# Altium PCB ESP32_RGBW_Controller-v2.PcbDoc
Units mm, origin at the board's own origin, x right, y up, seen from the top; angles counter-clockwise.
Board outline 34.92 x 50.42 mm, 2 copper layers (Top Layer, Bottom Layer); 11 components, 14 nets, 34 pads, 66 vias.
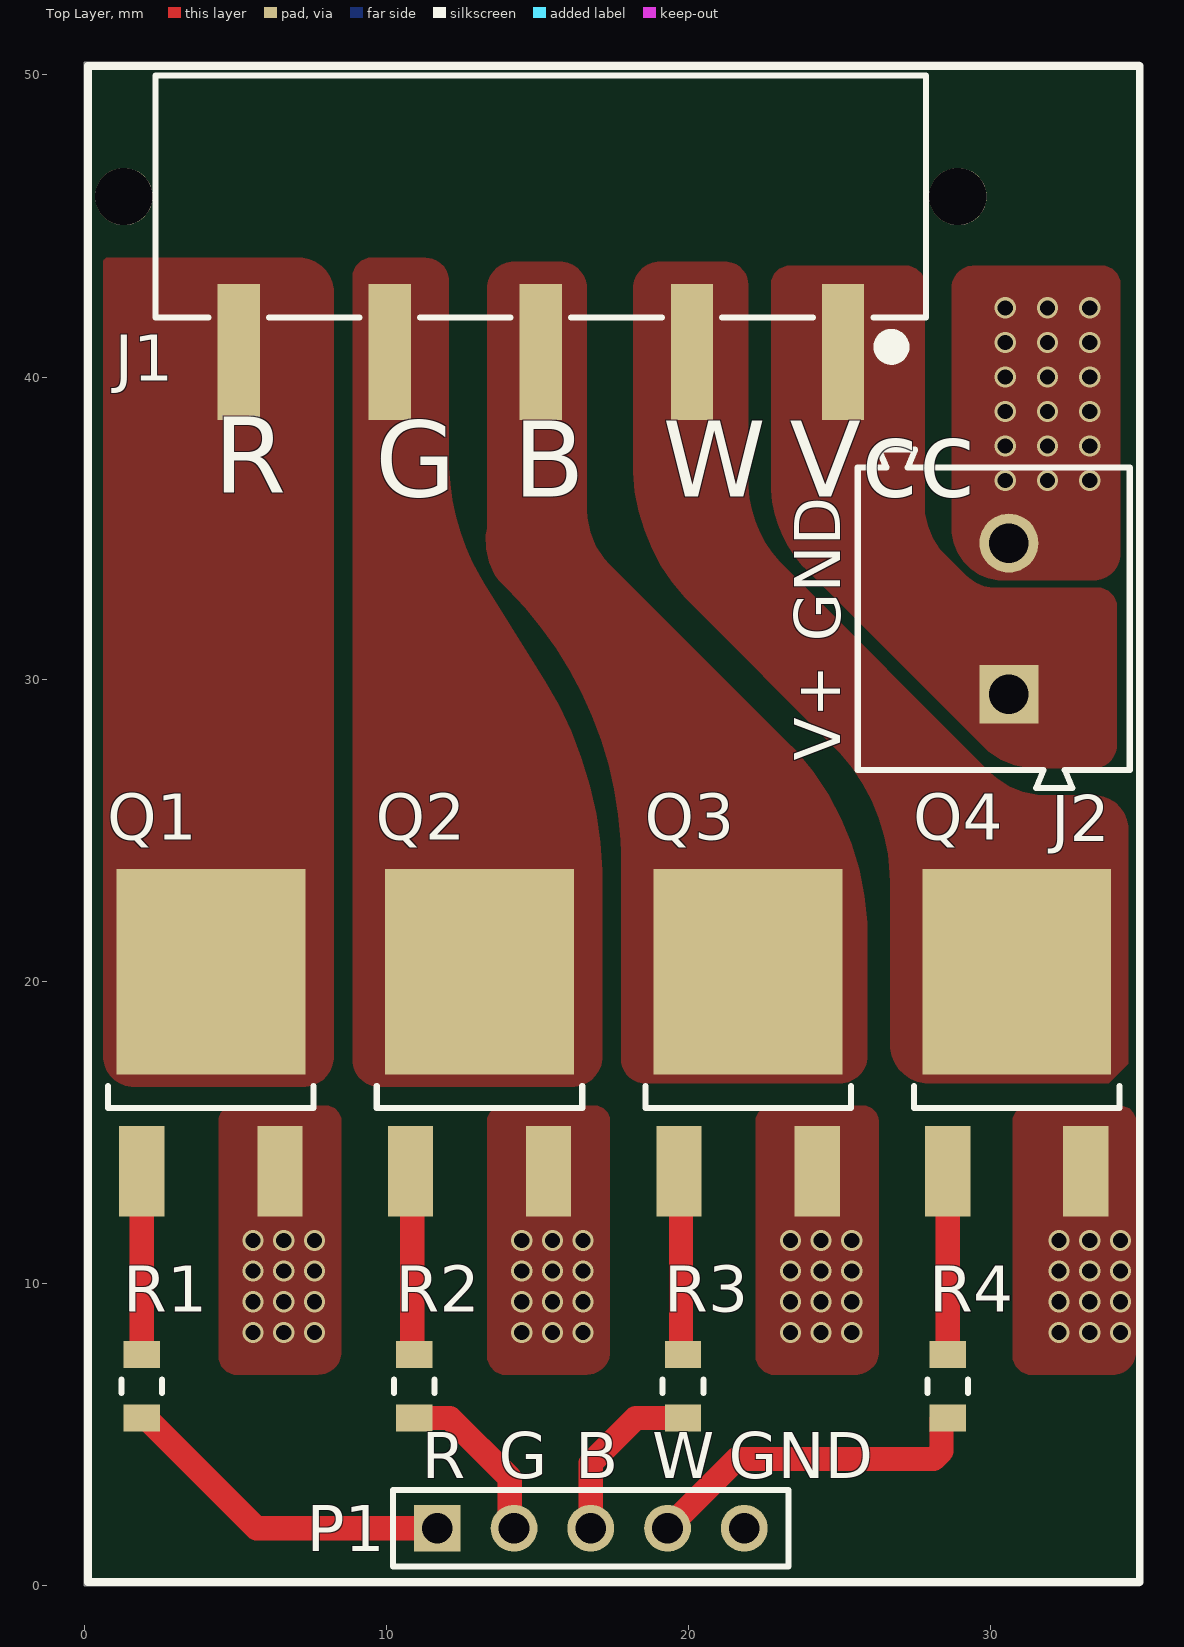
[diagram p0: Top Layer view]
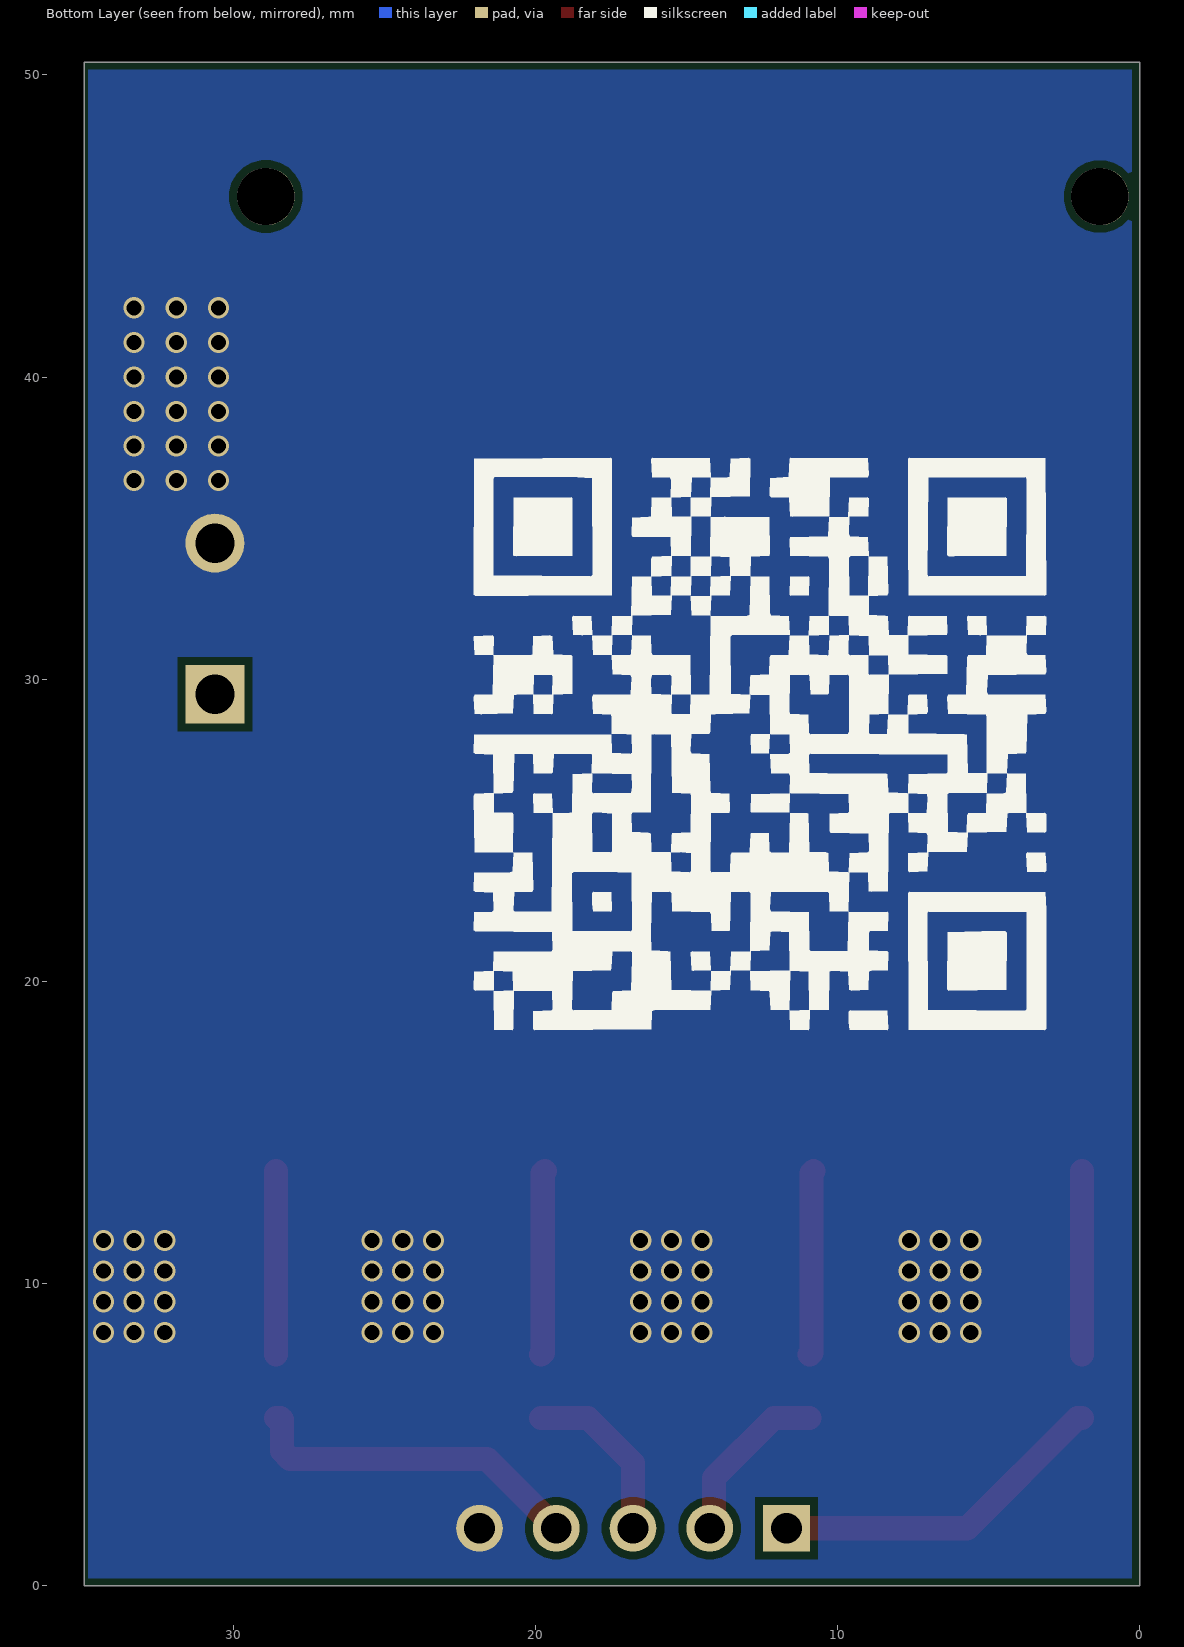
[diagram p1: Bottom Layer view, seen from below]
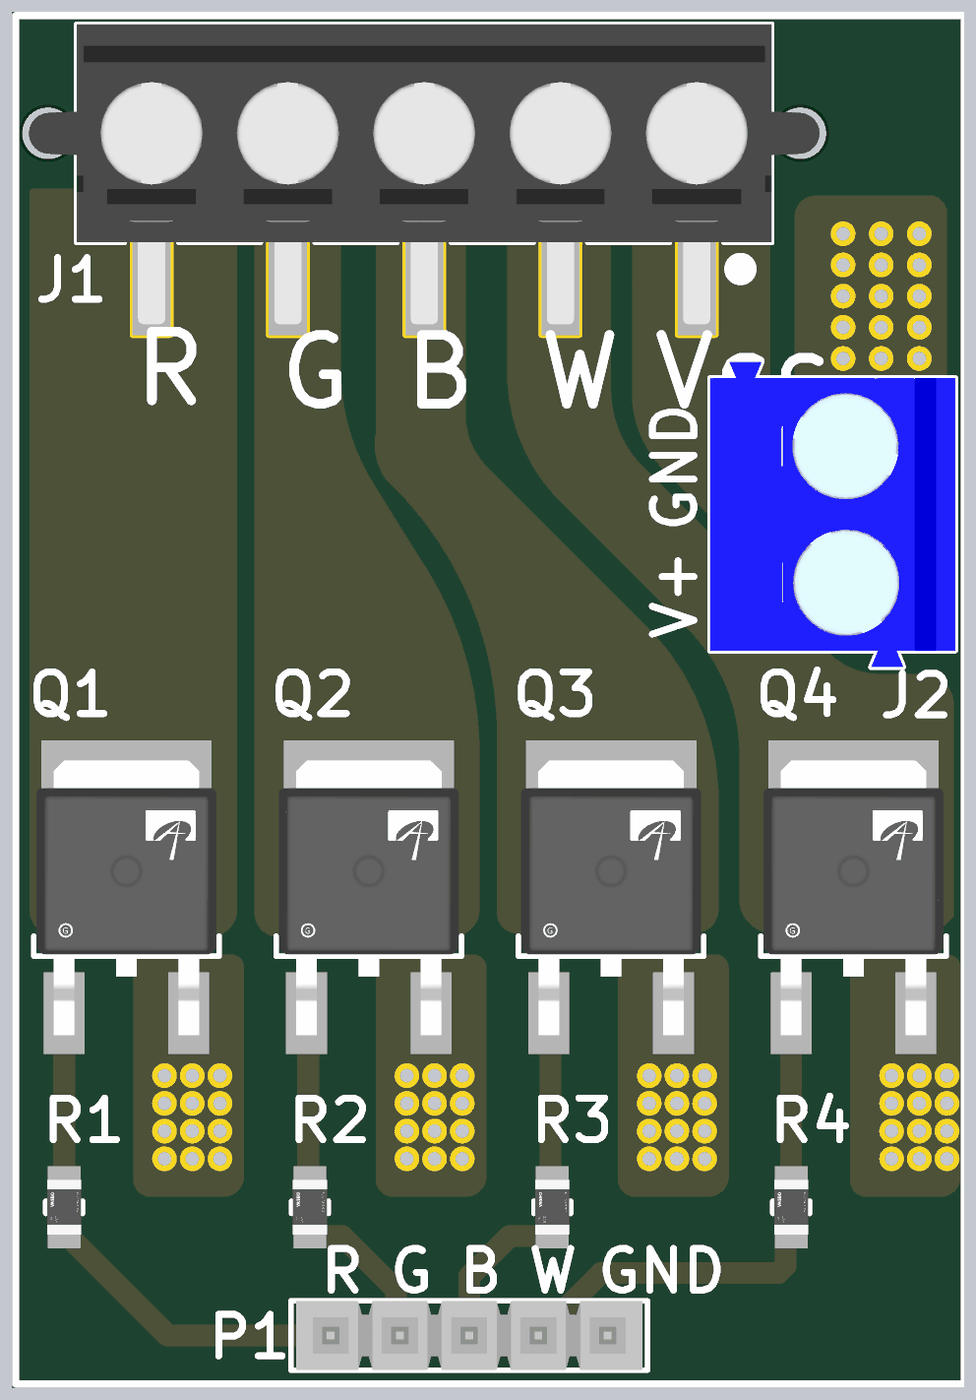
[diagram p2: 3D render of the assembled board from above, using the file's embedded part models]

## Layer stack, top to bottom
Top Solder: solder mask 0.0102, Solder Resist, Dk 3.5
Top Layer: signal copper 0.0356
Dielectric 1: dielectric 0.32, FR-4, Dk 4.8
Bottom Layer: signal copper 0.0356
Bottom Solder: solder mask 0.0102, Solder Resist, Dk 3.5

## Board outline
0,0 34.925,0 34.925,50.419 0,50.419

## Design rules (kind name [scope] priority, off if disabled: settings)
Clearance [All] p1: gap=0.254 ignorepadtopadclearanceinfootprint=FALSE except(0: Arc-Hole Track-Hole SMDPad-Hole THPad-Hole Via-Hole Fill-Hole Poly-Hole Region-Hole Text-Hole)
PolygonConnect [All] p1: connectstyle=Direct reliefconductorwidth=0.254 reliefentries=4 polygonreliefangle="90 Angle" airgapwidth=0.254
RoomDefinition ESP32_RGB_Controller [InComponentClass('ESP32_RGB_Controller')] p1: confinementstyle=ConfineIn formatcopy=TRUE lockcomponents=FALSE outline 101.092,57.912 175.006,57.912 175.006,74.422 101.092,74.422
RoutingVias [All] p1: holewidth=0.711 width=1.27 viastyle="Through Hole" minholewidth=0.711 minwidth=1.27 maxholewidth=0.711 maxwidth=1.27
SolderMaskExpansion [All] p1: expansion=0.102 istentingtop=FALSE
Width [All] p1: maxlimit=3.254 minlimit=0.254 preferedwidth=0.8 bottomlayer_prefwidth=0.254 minimp=50.000000 maximp=50.000000 favimp=50.000000
30 further rules are at their usual default settings.

## Components (designator, comment, footprint, x,y, rotation, side; value= is the part's Value field where it differs from the comment)
J1 "691709710305" 691709710305 15.113,45.974 r180 top
J2 "691101710002" 691101710002 30.099,32.004 r90 top
P1 "TSW-105-05-F-S" SMTC-TSW-105-05-X-S 11.684,1.905 r0 top
Q1 "AOD4184A" FP-TO252-MFG 4.191,18.923 r0 top
Q2 "AOD4184A" FP-TO252-MFG 13.081,18.923 r0 top
Q3 "AOD4184A" FP-TO252-MFG 21.971,18.922 r0 top
Q4 "AOD4184A" FP-TO252-MFG 30.861,18.922 r0 top
R1 "R0805 100" FP-SR0805-MFG 1.905,6.604 r90 top value=100Ω
R2 "R0805 100" FP-SR0805-MFG 10.922,6.604 r90 top value=100Ω
R3 "R0805 100" FP-SR0805-MFG 19.812,6.604 r90 top value=100Ω
R4 "R0805 100" FP-SR0805-MFG 28.575,6.604 r90 top value=100Ω

## Footprints (in the part's own frame and the unit in brackets; to place one, negate y for a bottom-side part, rotate by r counter-clockwise, add the part's x,y. Pads: shape width x height; smd on the part's side, far side on the other; paste and mask are expansions set on the pad)
691101710002 [mm] "5,00mm - modular - blue - Horizontal entry with pressure clamp - 12,6mm height - 02p"
  rect 1.95x1.95 hole 1.3: 1(-2.5,-0.5)
  round 1.95 hole 1.3: 2(2.5,-0.5)
  silkscreen extent -5.6,-4.5 5.6,4.5, body extent -5.6,-4.5 5.6,4.5, height 12.65
691709710305 [mm] "Horizontal Entry SMT with Pressure Clamp, pitch 5mm, 05p"
  rect 1.4x4.5 smd: 1(-10,5.15) 2(-5,5.15) 3(0,5.15) 4(5,5.15) 5(10,5.15)
  round 1.9 hole 1.9 unplated: M1(-13.8,0) M2(13.8,0)
  silkscreen extent -12.75,-4 12.75,5.17, body extent -14.5,-4 14.5,7, height 9.95
FP-SR0805-MFG [mm]
  rect 0.9x1.2 smd paste+0 mask+0: 1(-1.05,0) 2(1.05,0)
  silkscreen extent -0.23,-0.67 0.23,0.67, body extent -1.6,-0.77 1.6,0.77, height 0.25
FP-TO252-MFG [mm]
  rect 1.5x3 smd paste+0 mask+0: 1(-2.286,-5.202) 3(2.286,-5.202)
  rect 6.25x6.8 smd paste+0 mask+0: 4(0,1.398)
  silkscreen extent -3.4,-3.11 3.4,-2.38, body extent -3.58,-6.8 3.58,4.9, height 0.25
SMTC-TSW-105-05-X-S [mm] ".025 SQ Post Terminal Strip Assembly, 1x5 Pins, Vertical, 2.54mm Pitch, Male"
  rect 1.55x1.55 hole 1.02: 1(0,0)
  round 1.55 hole 1.02: 2(2.54,0) 3(5.08,0) 4(7.62,0) 5(10.16,0)
  silkscreen extent -1.46,-1.27 11.62,1.27, body extent -1.27,-1.27 11.43,1.27, height 5.21

## Part data
J1: library part CMP-1502-03338-1, "Serie 7097 - 5.00 mm Horizontal Entry SMT with Pressure Clamp WR-TBL, 5 pin", Manufacturer="Wurth Elektronik", Operating Temperature=-45to130degC, Datasheet URL=http://katalog.we-online.de/em/datasheet/6917097103xx.pdf, Manufacturer URL=http://www.we-online.de, Mounting Technology=SMT, Package Reference=691709710305, Packaging=TapeandReelwithCap, Part Number=691709710305, Pin Number=5, Pitch=5.00mm, Publisher=WurthElektronik
J2: library part CMP-1502-03256-1, "Series 101 - 5.00 mm Horizontal Entry Modular with Pressure Clamp WR-TBL, 2 pin", Manufacturer="Wurth Elektronik", Operating Temperature=-40to105degC, Datasheet URL=http://katalog.we-online.de/em/datasheet/6911017100xx.pdf, Manufacturer URL=http://www.we-online.de, Mounting Technology=THT, Package Reference=691101710002, Packaging=Box, Part Number=691101710002, Pin Number=2, Pitch=5.00mm, Publisher=WurthElektronik
P1: library part CMP-1024-00365-1, "0.025\" SQ Post Header, Through-hole, Vertical, -55 to 125 degC, 2.54 mm Pitch, 5-Pin, Male, RoHS", Manufacturer=Samtec, Temperature Range="-55 to 125 degC", ComponentLink1Description="Manufacturer URL", ComponentLink1URL=http://www.samtec.com, ComponentLink2Description=Datasheet, ComponentLink2URL=http://www.samtec.com/documents/webfiles/pdf/TSW_TH.PDF, ComponentLink3Description="Package Specification", ComponentLink3URL=http://www.samtec.com/documents/webfiles/cpdf/TSW-XXX-XX-XXX-X-XX-XXX-MKT.pdf, DatasheetVersion=F-214, Mounting Technology=Through-hole, Orientation=Vertical, PackageDescription=".025[0.64] SQ. Post Terminal Strip Assembly", PackageReference=TSW-105-05-X-S, PackageVersion="DM, 8/1988", PartNumber=TSW-105-05-F-S, Pitch="2.54 mm", RoHS=True
Q1 Q2 Q3 Q4: library part CMP-83955-000007-1, "MOSFET N-CH 40V 50A TO252", Case/Package=DPAK, Continuous Drain Current (ID)=50A, Drain to Source Voltage (Vdss)=40V, Gate to Source Voltage (Vgs)=20V, Input Capacitance=1.8nF, Max Operating Temperature=175°C, Max Power Dissipation=2.3W, Min Operating Temperature=-55°C, Power Dissipation=50W, Mount="Surface Mount", Number of Elements=1, Number of Pins=3, Packaging="Cut Tape", Radiation Hardening=No, Rds On Max=7mR
R1 R2 R3 R4: library part CMP-03412-018383-1, "RES 100 OHM 1% 1/2W 0805", Manufacturer=Yageo, Manufacturer Part Number=SR0805FR-47100RL, Package=SR0805, Power Rating=0.5W, Resistance=100Ω, Temperature="-55°C to +155°C", Temperature Range High=+155°C, Temperature Range Low=-55°C, Tolerance=0.01, Voltage Rating=150V, Automotive=Yes, Automotive Grade="Grade 0", Category=Res, ComponentLink2Description=Datasheet, ComponentLink2URL=http://www.yageo.com/documents/recent/PYu-SR_D_F%20tol_RoHS_L_3.pdf, Composition="Thick Film", Device Class L1="Passive Components", Device Class L2=Resistors, Device Class L3="Chip SMD Resistors", Digikey Description="RES 100 OHM 1% 1/2W 0805", Footprint Url=http://www.yageo.com/exep/pages/download/literatures/PYu-R_Mount_10.pdf, Height=0.6mm, Ipc Land Pattern Name=RESC200125X50, Lead Free=Yes, Octopart=https://octopart.com/sr0805fr-47100rl-yageo-91478093, RoHS=TRUE, Series=SR

## Via types
v1: diameter 0.7, hole 0.5, Top Layer to Bottom Layer, 66 vias

## Nets (pads, with @x,y where several pads share a name; then routed paths per layer and width w, separated by ;. In a path a pad name is that pad's centre, name@x,y a point inside that pad or via, vN(x,y) a via of type N, cw(c..) or ccw(c..) an arc to the next point about the centre after c; other vN are vias at no path point)
B: J1.3 Q3.4
G: J1.4 Q2.4
GND: J2.2 P1.5 Q1.3 Q2.3 Q3.3 Q4.3
  other v1: 5.588,8.382 6.604,8.382 7.62,8.382 14.478,8.382 15.494,8.382 16.51,8.382 23.368,8.382 24.384,8.382 25.4,8.382 32.258,8.382 33.274,8.382 34.29,8.382 5.588,9.398 6.604,9.398 7.62,9.398 14.478,9.398 15.494,9.398 16.51,9.398 23.368,9.398 24.384,9.398 25.4,9.398 32.258,9.398 33.274,9.398 34.29,9.398 5.588,10.414 6.604,10.414 7.62,10.414 14.478,10.414 15.494,10.414 16.51,10.414 23.368,10.414 24.384,10.414 25.4,10.414 32.258,10.414 33.274,10.414 34.29,10.414 5.588,11.43 6.604,11.43 7.62,11.43 14.478,11.43 15.494,11.43 16.51,11.43 23.368,11.43 24.384,11.43 25.4,11.43 32.258,11.43 33.274,11.43 34.29,11.43 30.48,36.576 31.877,36.576 33.274,36.576 30.48,37.719 31.877,37.719 33.274,37.719 30.48,38.862 31.877,38.862 33.274,38.862 30.48,40.005 31.877,40.005 33.274,40.005 30.48,41.148 31.877,41.148 33.274,41.148 30.48,42.291 31.877,42.291 33.274,42.291
NetP1_1: P1.1 R1.1 | length 11.3
  Top Layer w0.8: R1.1 2.055,5.554 5.704,1.905 P1.1
NetP1_2: P1.2 R2.1 | length 5.7
  Top Layer w0.8: R2.1 12.099,5.554 14.08,3.573 14.08,2.049 P1.2
NetP1_3: P1.3 R3.1 | length 5.8
  Top Layer w0.8: P1.3 16.764,4.064 18.254,5.554 R3.1
NetP1_4: P1.4 R4.1 | length 11.4
  Top Layer w0.8: P1.4 21.59,4.191 28.106,4.191 28.375,4.46 28.375,5.504 28.425,5.554 R4.1
NetQ1_1: Q1.1 R1.2 | length 6.1
  Top Layer w0.8: R1.2 Q1.1
NetQ2_1: Q2.1 R2.2 | length 6.1
  Top Layer w0.8: Q2.1 10.858,13.657 10.858,7.704 10.908,7.654 R2.2
NetQ3_1: Q3.1 R3.2 | length 6.1
  Top Layer w0.8: Q3.1 19.748,13.657 19.748,7.704 19.798,7.654 R3.2
NetQ4_1: Q4.1 R4.2 | length 6.1
  Top Layer w0.8: R4.2 Q4.1
R: J1.5 Q1.4
VCC: J1.1 J2.1
W: J1.2 Q4.4
pads on no net: J1.M1 J1.M2

## Polygon pours and split planes (outlines as drawn)
GND on Top Layer "GND_L01_P012" (solid, pour order 12): 34.798,15.362 34.798,7.742 cw(c34.041,7.742) 34.041,6.985 31.364,6.985 cw(c31.364,7.615) 30.734,7.615 30.734,15.362 cw(c31.246,15.362) 31.247,15.875 34.285,15.875 cw(c34.285,15.363)
GND on Top Layer "GND_L01_P010" (solid, pour order 10): 26.289,15.366 26.289,7.746 cw(c25.532,7.746) 25.532,6.989 22.855,6.989 cw(c22.855,7.619) 22.225,7.619 22.225,15.366 cw(c22.737,15.366) 22.738,15.879 25.776,15.879 cw(c25.776,15.367)
GND on Top Layer "GND_L01_P009" (solid, pour order 9): 17.399,15.367 17.399,7.747 cw(c16.642,7.747) 16.642,6.99 13.965,6.99 cw(c13.965,7.62) 13.335,7.62 13.335,15.367 cw(c13.847,15.367) 13.848,15.879 16.886,15.88 cw(c16.886,15.367)
GND on Top Layer "GND_L01_P008" (solid, pour order 8): 8.509,15.367 8.509,7.747 cw(c7.752,7.747) 7.752,6.99 5.075,6.99 cw(c5.075,7.62) 4.445,7.62 4.445,15.367 cw(c4.957,15.367) 4.958,15.879 7.996,15.88 cw(c7.996,15.367)
GND on Top Layer "GND_L01_P005" (solid, pour order 5): 33.401,33.274 30.415,33.274 cw(c30.415,34.956) 29.225,33.767 cw(c30.489,35.03) 28.702,35.03 28.702,42.926 cw(c29.464,42.926) 29.464,43.688 33.655,43.688 cw(c33.655,43.053) 34.29,43.053 34.29,34.163 cw(c33.401,34.163)
VCC on Top Layer "VCC_L01_P004" (solid, pour order 4): 22.733,43.053 22.733,36.458 ccw(c26.741,36.458) 23.907,33.624 29.74,27.791 ccw(c31.527,29.578) 31.527,27.051 33.401,27.051 ccw(c33.401,27.813) 34.163,27.813 34.163,32.385 ccw(c33.528,32.385) 33.528,33.02 30.204,33.02 cw(c30.204,34.5) 29.157,33.454 28.463,34.148 cw(c30.034,35.718) 27.813,35.718 27.813,43.053 ccw(c27.178,43.053) 27.178,43.688 23.368,43.688 ccw(c23.368,43.053)
W on Top Layer "W_L01_P003" (solid, pour order 3): 26.67,17.907 26.67,23.272 ccw(c20.307,23.272) 24.806,27.772 20.114,32.464 cw(c24.83,37.18) 18.161,37.18 18.161,42.926 cw(c19.05,42.926) 19.05,43.815 21.209,43.815 cw(c21.209,43.053) 21.971,43.053 21.971,36.585 ccw(c25.979,36.585) 23.145,33.751 29.991,26.905 ccw(c31.785,28.698) 31.785,26.162 33.401,26.162 cw(c33.401,25.019) 34.544,25.019 34.544,17.272 33.909,16.637 27.94,16.637 cw(c27.94,17.907)
B on Top Layer "B_L01_P002" (solid, pour order 2): 17.78,17.399 17.78,24.257 ccw(c4.864,23.86) 13.716,33.274 cw(c15.595,34.591) 13.335,34.988 13.335,42.926 cw(c14.224,42.926) 14.224,43.815 15.748,43.815 cw(c15.748,42.926) 16.637,42.926 16.637,35.591 ccw(c19.164,35.591) 17.377,33.804 23.238,27.943 cw(c16.793,21.498) 25.908,21.498 25.908,17.526 cw(c25.019,17.526) 25.019,16.637 18.542,16.637 cw(c18.542,17.399)
G on Top Layer "G_L01_P001" (solid, pour order 1): 8.89,43.307 8.89,17.399 ccw(c9.779,17.399) 9.779,16.51 16.129,16.51 ccw(c16.129,17.526) 17.145,17.526 17.145,23.193 ccw(c4.192,23.193) 14.986,30.353 13.239,33.163 cw(c19.857,37.276) 12.065,37.276 12.065,43.18 ccw(c11.303,43.18) 11.303,43.942 9.525,43.942 ccw(c9.525,43.307)
R on Top Layer "R_L01_P000" (solid, pour order 0): 1.651,16.51 7.239,16.51 ccw(c7.239,17.526) 8.255,17.526 8.255,42.799 ccw(c7.112,42.799) 7.112,43.942 0.762,43.942 ccw(c0.762,43.815) 0.635,43.815 0.635,17.526 ccw(c1.651,17.526)
GND on Bottom Layer "GND_L02_P013" (solid, pour order 13): 0.254,50.165 0.254,0.254 34.798,0.254 34.798,50.165

## Silkscreen, mask and mechanical layers (free items; w line width, h text height)
Top Overlay:
  lines w0.254: 0.127,0.127 34.925,0.127 34.925,50.292 0.127,50.292 0.127,0.127
  text "R" at 4.291,36.168 h2.52
  text "G" at 9.625,36.041 h2.52
  text "B" at 14.197,36.041 h2.52
  text "W" at 19.15,36.041 h2.52
  text "Vcc" at 23.341,36.041 h2.52
  text "GND" at 25.019,31.242 h1.52 r90
  text "V+" at 25.019,27.305 h1.52 r90
  text "R" at 11.176,3.556 h1.52
  text "G" at 13.716,3.556 h1.52
  text "B" at 16.256,3.556 h1.52
  text "W" at 18.796,3.556 h1.52
  text "GND" at 21.336,3.556 h1.52
Bottom Overlay:
  drawing of 20 lines, arcs and shapes, not listed